# Altium PCB NS6202_V3.0.PcbDoc
Units mm, origin at the board's own origin, x right, y up, seen from the top; angles counter-clockwise.
Board outline 60.47 x 59.8 mm, 2 copper layers (Top, Bottom), stack 0.323 mm thick; 81 components, 109 nets, 381 pads, 283 vias.
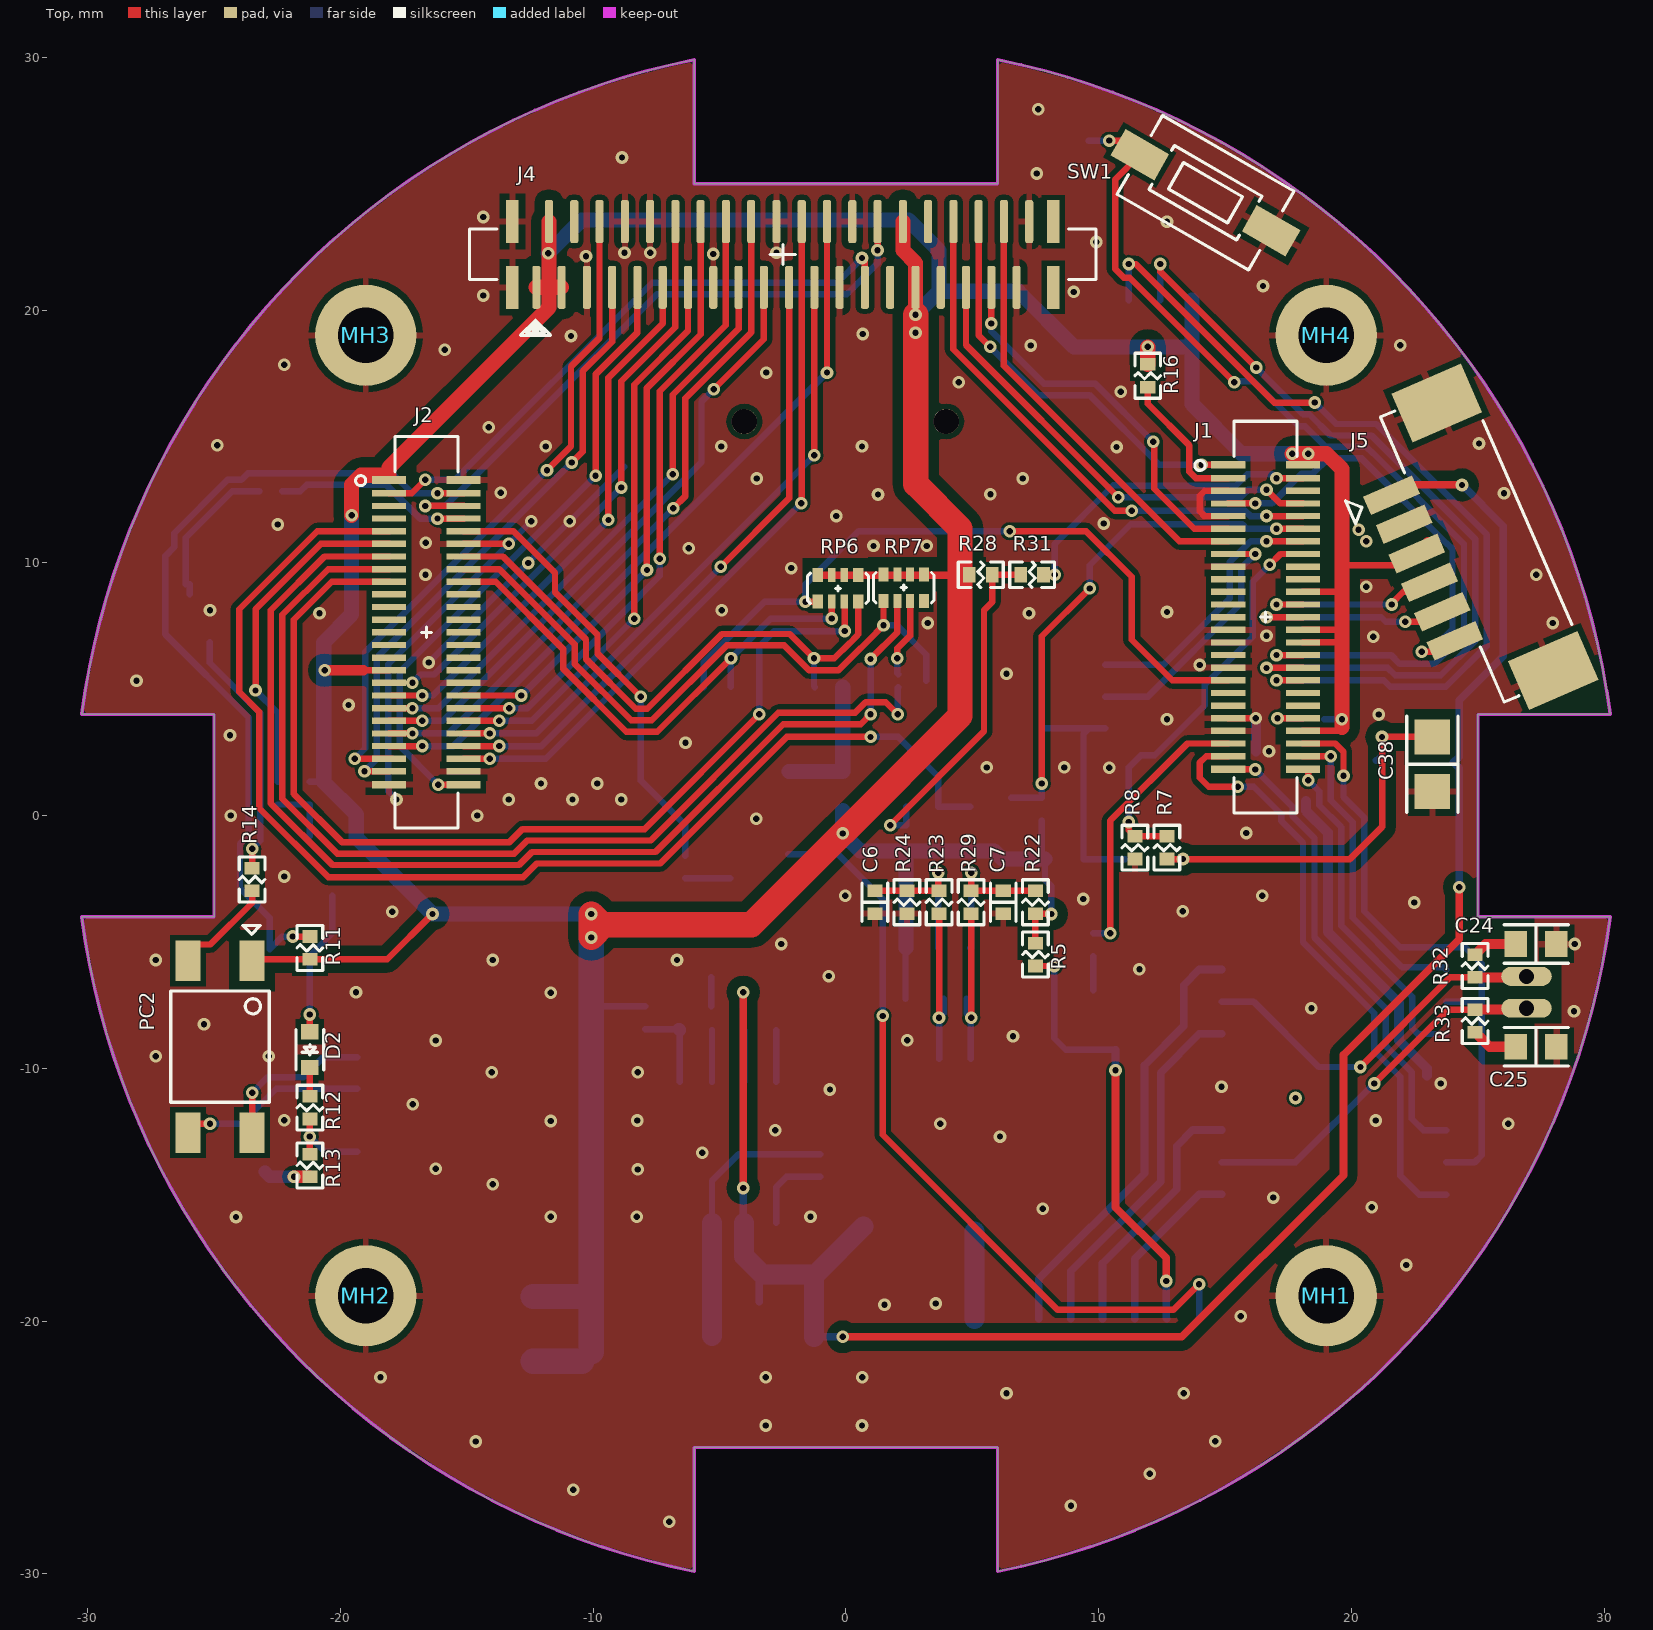
[diagram p0: Top view]
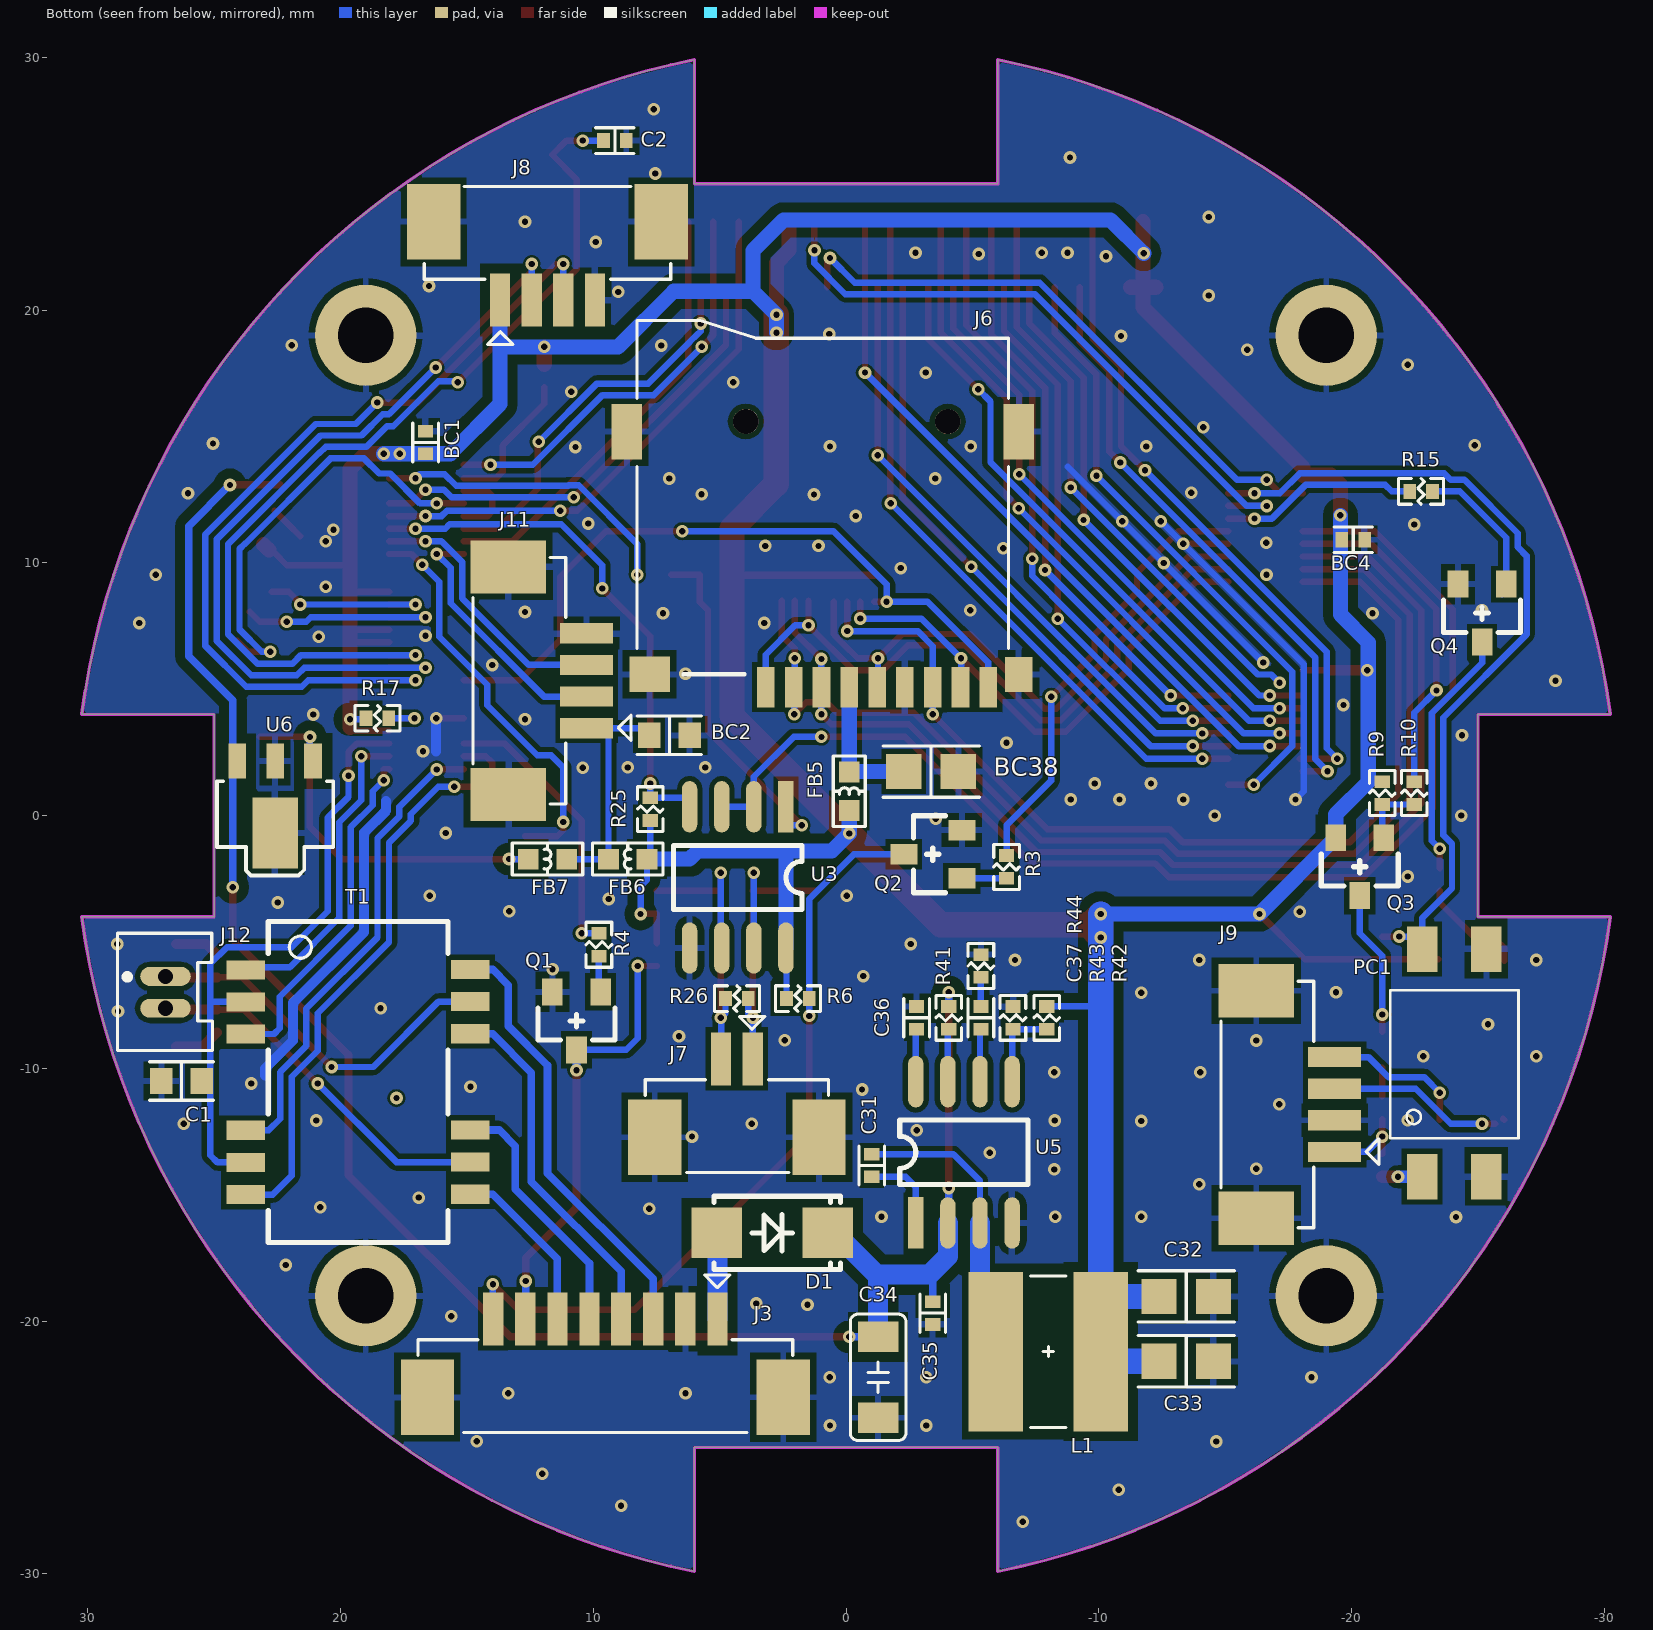
[diagram p1: Bottom view, seen from below]

## Layer stack, top to bottom
Solder Mask Top: solder mask 0.0102, Solder Resist, Dk 3.5
Top: signal copper 0.0343
Dielectric 1: core 0.254, FR-4, Dk 4.2
Bottom: signal copper 0.0343
Solder Mask Bottom: solder mask 0.0102, Solder Resist, Dk 3.5

## Board outline
-30.234,-4 -25,-4 -25,4 -30.234,4 -30.234,4.022 cw(c0,0) -6.018,29.9 -6,29.9 -6,25 6,25 6,29.9 6.011,29.902 cw(c0,0) 30.234,4.018 30.234,4 25,4 25,-4 30.228,-4 30.236,-4.001 cw(c0,0) 6.008,-29.902 6,-29.9 6,-25 -6,-25 -6,-29.9 -6.011,-29.902 cw(c0,0)

## Design rules (kind name [scope] priority, off if disabled: settings)
Clearance Clearance_4 [OnLayer('Keep-Out Layer') vs InNet('GND')] p1: gap=0.001
Clearance Clearance_3 [IsRegion vs (InNet('+12V') OR InNet('+12V_POE') OR InNet('+3.3V')OR InNet('+1.8V') or Innet('+5.0V')or Innet('N17346698'))] p2: gap=0.4
Clearance Clearance_2 [(InComponent('RP6') OR InComponent('RP7'))] p3: gap=0.16
Clearance Clearance_1 [IsVia] p4: gap=0.1
Clearance [All] p5: gap=0.2
ComponentClearance ComponentClearance_1 [(InComponent('J5') or InComponent('J6')) vs (InComponent('MH4') or InComponent('J8') or InComponent('J11'))] p1: gap=0 collisioncheckmode=3 verticalgap=0 showdistances=FALSE
ComponentClearance [All] p2: gap=0.01 collisioncheckmode=3 verticalgap=0.254 showdistances=FALSE
HoleSize [All] p1: absolutevalues=TRUE maxlimit=3.27 minlimit=0.025 maxpercent=80.000 minpercent=20.000
HoleToHoleClearance [All] p1: gap=0.01 allowstackedmicrovias=TRUE
MinimumSolderMaskSliver [All] p1: minsoldermaskwidth=0.01
PlaneConnect "Power Plane Connect Style - pads with no thermal_2" [(Name='U44-1') Or (Name='U45-1') Or (Name='U46-1') Or (Name='U47-1') Or (Name='U48-1') Or (Name='U49-1') Or (Name='U50-1') Or (Name='U51-1') Or (Name='U52-1') Or (Name='U55-1') Or (Name='U56-1') Or (Name='U57-1') Or (Name='U58-1') Or (Name='U6-1') Or (Name='U7-1') Or (Name='U8-1') Or (Name='U9-1')] p1: planeconnectstyle=NoConnect reliefexpansion=0.508 reliefentries=4 reliefconductorwidth=0.254 reliefairgap=0.254 // PAD - No Thermal Connect Rule
PlaneConnect "Power Plane Connect Style - pads with no thermal" [(Name='J10-0') Or (Name='J10-0/2') Or (Name='J11-0') Or (Name='J11-0/2') Or (Name='J13-6') Or (Name='J13-7') Or (Name='J2-13') Or (Name='J2-14') Or (Name='J4-15') Or (Name='J4-16') Or (Name='J6-5') Or (Name='J6-6') Or (Name='J6-9') Or (Name='J6-10') Or (Name='LS1-5') Or (Name='LS1-6') Or (Name='LS1-7') Or (Name='SW1-1') Or (Name='SW1-4') Or (Name='U10-1') Or (Name='U11-1') Or (Name='U12-1') Or (Name='U13-1') Or (Name='U14-1') Or (Name='U15-1') Or (Name='U16-1') Or (Name='U17-1') Or (Name='U18-1') Or (Name='U19-1') Or (Name='U20-1') Or (Name='U21-1') Or (Name='U22-1') Or (Name='U23-1') Or (Name='U24-1') Or (Name='U25-1') Or (Name='U26-1') Or (Name='U27-1') Or (Name='U28-1') Or (Name='U29-1') Or (Name='U30-1') Or (Name='U31-1') Or (Name='U32-1') Or (Name='U33-1') Or (Name='U34-1') Or (Name='U35-1') Or (Name='U36-1') Or (Name='U37-1') Or (Name='U38-1') Or (Name='U39-1') Or (Name='U40-1') Or (Name='U41-1') Or (Name='U42-1') Or (Name='U43-1')] p2: planeconnectstyle=NoConnect reliefexpansion=0.508 reliefentries=4 reliefconductorwidth=0.254 reliefairgap=0.254 // PAD - No Thermal Connect Rule
PlaneConnect [All] p3: planeconnectstyle=Relief reliefexpansion=0.508 reliefentries=4 reliefconductorwidth=0.254 reliefairgap=0.254
PolygonConnect PolygonConnect_1 [isVia] p1: connectstyle=Direct reliefconductorwidth=0.254 reliefentries=4 polygonreliefangle="90 Angle" airgapwidth=0.254
PolygonConnect [All] p2: connectstyle=Relief reliefconductorwidth=0.254 reliefentries=4 polygonreliefangle="90 Angle" airgapwidth=0.254
RoutingVias [All] p1: holewidth=0.25 width=0.5 viastyle="Through Hole" minholewidth=0.25 minwidth=0.5 maxholewidth=0.25 maxwidth=0.5
SilkToBoardRegionClearance [All] p1 off:
SilkToSilkClearance [All] p1: silktosilkclearance=0.01
SilkToSolderMaskClearance SilkToSolderMaskClearance_1 [OnLayer('Multi-Layer')] p1: minsilkscreentomaskgap=0 clearancetoexposedcopper=TRUE
SilkToSolderMaskClearance [IsPad] p2: minsilkscreentomaskgap=0.01 clearancetoexposedcopper=TRUE
SolderMaskExpansion [All] p1: expansion=0.102
Width Width_2 [InNet('VDD_3.3V')  or InNet('VDD_5.0V')] p1: maxlimit=3 minlimit=0.254 preferedwidth=2.4
Width Width_1 [InNet('+12V')] p2: maxlimit=1 minlimit=0.3 preferedwidth=0.5
Width [All] p3: maxlimit=1 minlimit=0.254 preferedwidth=0.254
21 further rules are at their usual default settings.

## Components (designator, comment, footprint, x,y, rotation, side; value= is the part's Value field where it differs from the comment)
BC1 "0.1uF" CS-1005 16.637,14.759 r270 bottom
BC2 "0.1uF" CS-1608 6.99,3.175 r0 bottom
BC4 "0.1uF" CS-1005 -20.066,10.911 r0 bottom
BC38 "22uF" CS-2012 -3.364,1.742 r0 bottom
C1 "0.1uF" CS-1608 26.289,-10.5 r0 bottom
C2 "1nF/NI" CS-1005 9.144,26.705 r180 bottom
C6 "2.2nF" CS-1005 1.143,-3.429 r90 top
C7 "2.2nF" CS-1005 6.223,-3.429 r90 top
C24 "0.1uF" CS-1608 27.305,-5.08 r0 top
C25 "0.1uF" CS-1608 27.305,-9.144 r0 top
C31 "10nF" CS-1005 -1.016,-13.843 r90 bottom
C32 "22uF-2012-6.3V" CS-2012 -13.462,-19.024 r180 bottom
C33 "22uF-2012-6.3V" CS-2012 -13.462,-21.59 r180 bottom
C34 "4.7uF-25V" C3216 -1.27,-22.225 r270 bottom
C35 "0.1uF" CS-1005 -3.429,-19.685 r270 bottom
C36 "0.1uF" CS-1005 -2.794,-8.001 r90 bottom
C37 "3.3nF" CS-1005 -5.334,-8.001 r90 bottom
C38 "22uF-2012-6.3V" CS-2012 23.201,2.032 r270 top
D1 "RB051L-40" SOD-106 2.921,-16.51 r180 bottom
D2 "1N4148" SOD-523 -21.209,-9.262 r90 top
FB5 "60" LS-1608 -0.127,0.962 r90 bottom
FB6 "60/NI" LS-1608 8.636,-1.72 r0 bottom
FB7 "60" LS-1608 11.811,-1.72 r180 bottom
J1 "AXK6F30547" AXK6F50547 16.6,7.85 r270 top locked
J2 "AXK6F50347" AXK6F50547 -16.6,7.25 r270 top locked
J3 "12505WS-08" 12505WS-8P 9.525,-21.463 r180 bottom
J4 "05005HS-40" 05005HS-40P -2.5,22.2 r0 top locked
J5 "12505WS-06" 12505WS-6P 24.257,10.414 r293.5 top
J6 "CON_u-SD/NI" CON_u-SD 3.175,5.08 r180 bottom
J7 "12505WS-2P" 12505WS-2P 4.318,-11.176 r0 bottom
J8 "12505WS-4P//NI" 12505WS-4P 11.811,21.942 r0 bottom
J9 "12505WS-4P//NI" 12505WS-4P -17.78,-11.43 r270 bottom
J11 "12505WS-4P//NI" 12505WS-4P 11.811,5.334 r270 bottom
J12 "12512WS-02//NI" 12512WS-2P 26.924,-6.992 r270 bottom
L1 "CDRH5D18NP-100NC-10uH" CDRH5D18NP -8.001,-21.209 r270 bottom
MH1 "4.04pi" VA-2.2 19,-19 r0 top locked
MH2 "4.04pi" VA-2.2 -19,-19 r0 top locked
MH3 "4.04pi" VA-2.2 -19,19 r0 top locked
MH4 "4.04pi" VA-2.2 19,19 r0 top locked
PC1 "PC817" PC817 -24.003,-9.779 r90 bottom
PC2 "ASSR-4118" ASSR-4118 -24.765,-9.144 r180 top
Q1 "MMBT6427" SOT-23 10.668,-8.128 r270 bottom
Q2 "MMBT6427" SOT-23 -3.425,-1.524 r0 bottom
Q3 "MMBT3906" SOT-23 -20.32,-2.032 r270 bottom
Q4 "MMBT6427" SOT-23 -25.159,8.001 r270 bottom
R3 "10K" RS-1005#1 -6.35,-2.032 r90 bottom
R4 "10K" RS-1005#1 9.779,-5.111 r90 bottom
R5 "1K" RS-1005#1 7.493,-5.5 r270 top
R6 "1K" RS-1005#1 1.905,-7.239 r180 bottom
R7 "1K" RS-1005#1 12.7,-1.27 r270 top
R8 "0/NI" RS-1005#1 11.43,-1.27 r270 top
R9 "10K" RS-1005#1 -21.214,0.889 r270 bottom
R10 "1K" RS-1005#1 -22.479,0.889 r270 bottom
R11 "10K" RS-1005#1 -21.209,-5.236 r270 top
R12 "330" RS-1005#1 -21.209,-11.557 r90 top
R13 "2.2K" RS-1005#1 -21.209,-13.843 r270 top
R14 "330" RS-1005#1 -23.495,-2.529 r90 top
R15 "1K" RS-1005#1 -22.751,12.827 r180 bottom
R16 "10K" RS-1005#1 11.938,17.399 r90 top
R17 "10K" RS-1005#1 18.542,3.85 r0 bottom
R22 "10K" RS-1005#1 7.493,-3.429 r270 top
R23 "47" RS-1005#1 3.683,-3.429 r270 top
R24 "10K" RS-1005#1 2.413,-3.429 r90 top
R25 "10K" RS-1005#1 7.747,0.254 r270 bottom
R26 "120/NI" RS-1005#1 4.318,-7.239 r180 bottom
R28 "10K" RS-1005#2 5.334,9.525 r0 top
R29 "47" RS-1005#1 4.953,-3.429 r270 top
R31 "100" RS-1005#1 7.366,9.527 r180 top
R32 "75" RS-1005#1 24.892,-5.95 r270 top
R33 "75" RS-1005#1 24.892,-8.128 r90 top
R41 "100K" RS-1005#1 -4.064,-8.001 r270 bottom
R42 "26.1K_1%" RS-1005#1 -7.939,-8.001 r270 bottom
R43 "10K_1%" RS-1005#1 -6.604,-8.001 r270 bottom
R44 "2.2K" RS-1005#1 -5.334,-5.95 r270 bottom
RP6 "10K" RP-4_1005 -0.313,8.987 r180 top
RP7 "10K" RP-4_1005 2.286,9.017 r180 top
SW1 "SW PB" SWS-CTT-1131U 14.224,24.638 r150 top
T1 "TRC41604NL" TRC41604NL 19.304,-10.541 r270 bottom
U3 "MAX3485ESA" SOIC-8 4.318,-2.432 r0 bottom
U5 "MP1482" SOIC-8 -4.699,-13.335 r180 bottom
U6 "78L05" SOT-89 22.586,2.158 r0 bottom

## Footprints (in the part's own frame and the unit in brackets; to place one, negate y for a bottom-side part, rotate by r counter-clockwise, add the part's x,y. Pads: shape width x height; smd on the part's side, far side on the other; paste and mask are expansions set on the pad)
05005HS-40P [mm]
  rrect50% 0.32x1.7 smd: 1(-9.75,-1.3) 2(-9.25,1.3) 3(-8.75,-1.3) 4(-8.25,1.3) 5(-7.75,-1.3) 6(-7.25,1.3) 7(-6.75,-1.3) 8(-6.25,1.3) 9(-5.75,-1.3) 10(-5.25,1.3) 11(-4.75,-1.3) 12(-4.25,1.3) 13(-3.75,-1.3) 14(-3.25,1.3) 15(-2.75,-1.3) 16(-2.25,1.3) 17(-1.75,-1.3) 18(-1.25,1.3) 19(-0.75,-1.3) 20(-0.25,1.3) 21(0.25,-1.3) 22(0.75,1.3) 23(1.25,-1.3) 24(1.75,1.3) 25(2.25,-1.3) 26(2.75,1.3) 27(3.25,-1.3) 28(3.75,1.3) 29(4.25,-1.3) 30(4.75,1.3) 31(5.25,-1.3) 32(5.75,1.3) 33(6.25,-1.3) 34(6.75,1.3) 35(7.25,-1.3) 36(7.75,1.3) 37(8.25,-1.3) 38(8.75,1.3) 39(9.25,-1.3) 40(9.75,1.3)
  rect 0.5x1.7 smd: M1(-10.7,1.3) M2(-10.7,-1.3) M3(10.7,1.3) M4(10.7,-1.3)
  silkscreen extent -12.4,-3.2 12.4,1
12505WS-2P [mm]
  rect 0.8x2.1 smd: 1(-0.625,-1.55) 2(0.625,-1.55)
  rect 2.1x3 smd: 3(3.25,1.55) 4(-3.25,1.55)
  silkscreen extent -3.62,-3.22 3.63,2.95
12505WS-4P [mm]
  rect 0.8x2.1 smd: 1(1.875,1.55) 2(0.625,1.55) 3(-0.625,1.55) 4(-1.875,1.55)
  rect 2.1x3 smd: 5(-4.5,-1.55) 6(4.5,-1.55)
  silkscreen extent -4.88,-2.95 4.88,3.3
12505WS-6P [mm]
  rect 0.8x2.1 smd: 1(-3.145,-1.55) 2(-1.895,-1.55) 3(-0.625,-1.55) 4(0.625,-1.55) 5(1.895,-1.55) 6(3.145,-1.55)
  rect 2.1x3 smd: M1(-5.77,1.55) M2(5.77,1.55)
  silkscreen extent -6.14,-3.31 6.15,2.95
12505WS-8P [mm]
  rect 0.8x2.1 smd: 1(4.435,1.55) 2(3.165,1.55) 3(1.895,1.55) 4(0.625,1.55) 5(-0.625,1.55) 6(-1.895,1.55) 7(-3.165,1.55) 8(-4.435,1.55)
  rect 2.1x3 smd: 9(7.04,-1.55) 10(-7.04,-1.55)
  silkscreen extent -7.41,-2.95 7.41,3.29
12512WS-2P [mm]
  oval 0.75x2 hole 0.6: 1(-0.63,0) 2(0.63,0)
  silkscreen extent -2.34,-1.9 2.3,1.87
ASSR-4118 [mm]
  rect 1x1.6 smd: 1(-1.27,-3.4) 2(1.27,-3.4) 3(1.27,3.4) 4(-1.27,3.4)
  silkscreen extent -1.95,-4.8 1.95,2.2
AXK6F50547 [mm]
  rect 0.3x1.35 smd: 1(-6.025,-1.475) 2(-6.025,1.475) 49(6.025,-1.475) 50(6.025,1.475)
  rect 0.25x1.35 smd: 3(-5.5,-1.475) 4(-5.5,1.475) 5(-5,-1.475) 6(-5,1.475) 7(-4.5,-1.475) 8(-4.5,1.475) 9(-4,-1.475) 10(-4,1.475) 11(-3.5,-1.475) 12(-3.5,1.475) 13(-3,-1.475) 14(-3,1.475) 15(-2.5,-1.475) 16(-2.5,1.475) 17(-2,-1.475) 18(-2,1.475) 19(-1.5,-1.475) 20(-1.5,1.475) 21(-1,-1.475) 22(-1,1.475) 23(-0.5,-1.475) 24(-0.5,1.475) 25(0,-1.475) 26(0,1.475) 27(0.5,-1.475) 28(0.5,1.475) 29(1,-1.475) 30(1,1.475) 31(1.5,-1.475) 32(1.5,1.475) 33(2,-1.475) 34(2,1.475) 35(2.5,-1.475) 36(2.5,1.475) 37(3,-1.475) 38(3,1.475) 39(3.5,-1.475) 40(3.5,1.475) 41(4,-1.475) 42(4,1.475) 43(4.5,-1.475) 44(4.5,1.475) 45(5,-1.475) 46(5,1.475) 47(5.5,-1.475) 48(5.5,1.475)
  silkscreen extent -7.75,-2.8 7.75,1.25
C3216 [mm]
  rect 1.2x1.6 smd: 1(-1.6,0) 2(1.6,0)
  silkscreen extent -2.5,-1.1 2.5,1.1
CDRH5D18NP [mm]
  rect 6.3x2.15 smd: 1(0,-2.075) 2(0,2.075)
  silkscreen extent -3,-0.7 3,0.7
CON_u-SD [mm]
  rect 0.7x1.6 smd: 1(0,0) 2(1.105,0) 3(2.201,0) 4(3.303,0) 5(4.407,0) 6(5.504,0) 7(6.6,0) 8(7.705,0) CD(8.801,0)
  rect 1.1x1.4 smd: 9(10.006,0.499)
  rect 1.6x1.4 smd: 10(-4.596,0.508)
  rect 1.2x2.2 smd: 11(10.012,10.108) 12(-5.497,10.108)
  round 1 hole 1: 13(7.198,10.509) 14(-0.79,10.513)
  silkscreen extent -5.1,0.48 9.6,14.51
CS-1005 [mm]
  rect 0.5x0.6 smd: 1(-0.45,0) 2(0.45,0)
  silkscreen extent -0.76,-0.51 0.76,0.51
CS-1608 [mil]
  rect 35x40 smd: 1(-31.5,0) 2(31.5,0)
  silkscreen extent -50,-30 50,30
CS-2012 [mil]
  rect 55x55 smd: 1(-42.5,0) 2(42.5,0)
  silkscreen extent -75,-40 75,40
LS-1608 [mil]
  rect 32x32 smd: 1(-30,0) 2(30,0)
  silkscreen extent -55,-25 55,25
PC817 [mm]
  rect 1.8x1.2 smd: 1(-4.506,1.208) 2(-4.506,-1.332) 3(4.494,-1.332) 4(4.494,1.208)
  silkscreen extent -2.98,-2.6 2.86,2.48
RP-4_1005 [mm]
  rect 0.406x0.55 smd: 1(-0.8,0.525) 2(-0.8,-0.525) 7(0.8,0.525) 8(0.8,-0.525)
  rect 0.305x0.55 smd: 3(-0.25,0.525) 4(-0.25,-0.525) 5(0.25,0.525) 6(0.25,-0.525)
  silkscreen extent -1.2,-0.6 1.2,0.6
RS-1005#1 [mm]
  rect 0.5x0.6 smd: 1(-0.45,0) 2(0.45,0)
  silkscreen extent -0.89,-0.51 0.89,0.51
RS-1005#2 [mm]
  rect 0.5x0.6 smd: 1(0.45,0) 2(-0.45,0)
  silkscreen extent -0.89,-0.51 0.89,0.51
SOD-106 [mm]
  rrect0% 2x2 smd: 1(-2.2,0) 2(2.2,0)
  silkscreen extent -2.3,-1.45 2.7,1.45
SOD-523 [mm]
  rect 0.6x0.7 smd: 1(0.71,0) 2(-0.71,0)
  silkscreen extent -0.8,-0.55 0.8,0.55
SOIC-8 [mil]
  rect 24x80 smd: 1(-76.34,-109.45)
  oval 24x80 smd: 2(-26.34,-109.45) 3(23.66,-109.45) 4(73.66,-109.45) 5(73.66,110.55) 6(23.66,110.55) 7(-26.34,110.55) 8(-76.34,110.55)
  silkscreen extent -101,-49 99,51
SOT-23 [mil]
  rect 42x32 smd: 1(-45.45,37.75) 2(-45.45,-37.35) 3(44.85,0.2)
  silkscreen extent -20,-60 30,60
SOT-89 [mm]
  rect 0.7x1.4 smd: 1(-1.5,0) 2(0,0) 3(1.5,0)
  rect 1.8x2.8 smd: 4(0,2.85)
  silkscreen extent -2.3,0.8 2.3,4.52
SWS-CTT-1131U [mm]
  rect 2x1.2 smd: 1(-3,0) 2(3,0)
  silkscreen extent -3,-1.8 3,1.8
TRC41604NL [mm]
  rect 0.76x1.52 smd: 1(-4.436,-4.445) 2(-3.168,-4.445) 3(-1.898,-4.445) 6(1.912,-4.445) 7(3.182,-4.445) 8(4.452,-4.445) 9(4.438,4.445) 10(3.168,4.445) 11(1.898,4.445) 14(-1.912,4.445) 15(-3.182,4.445) 16(-4.452,4.445)
  silkscreen extent -6.35,-3.56 6.35,3.56
VA-2.2 [mm]
  rrect100% 4x4 hole 2.2: 1(0,0)

## Via types
v1: diameter 0.5, hole 0.25, Top to Bottom, tented both sides, 283 vias

## Nets (pads, with @x,y where several pads share a name; then routed paths per layer and width w, separated by ;. In a path a pad name is that pad's centre, name@x,y a point inside that pad or via, vN(x,y) a via of type N, cw(c..) or ccw(c..) an arc to the next point about the centre after c; other vN are vias at no path point)
+3.3V: BC1.2 BC4.2 C32.1 C33.1 FB5.1 FB6.1 J1.2 J1.22 J1.28 J1.30 J1.44 J2.1 J2.31 J4.1 J4.2 J4.3 J4.30 J4.31 J5.3 J8.1 L1.2 PC2.1 Q3.2 R5.1 R6.1 R9.1 R11.2 R16.2 R17.2 R22.2 R25.2 R28.2 R42.1 RP6.2 RP6.4 RP6.6 RP6.8 RP7.2 RP7.4 RP7.6 RP7.8 U3.8 | length 205.4
  Top w0.254: PC2.1@-23.437,-5.686 R11.2 -18.151,-5.686 v1(-16.357,-3.892) ; -19.082,5.75 J2.31 ; R5.1 R22.2 v1@8.115,-3.879 ; J1.44 19.479,3.35 19.621,3.492 ; J1.30 19.57,6.85 ; J1.28 19.57,7.35 ; J1.22 19.57,8.85 ; 19.637,9.906 22.123,9.906 J5.3
  Top w0.3: RP6.8 RP6.6 RP6.4 RP6.2 4.502,9.512
  Top w0.4: v1(-20.623,5.75) -19.082,5.75
  Top w0.6: v1(-19.558,11.877) -19.558,13.091 -19.187,13.462 -18.075,13.462 ; -18.075,13.776 -11.75,20.101 -11.75,20.9 ; J4.1 -11.75,20.9 ; J4.2 -11.75,20.9 ; J4.3 -11.75,20.9 ; J4.30 2.25,22.367 2.75,21.867 J4.31 v1(2.75,19.812) ; R16.2 v1(11.938,18.542) ; v1(17.653,14.313) v1(18.288,14.313) 19.017,14.313 19.621,13.708 v1(19.621,3.81) 19.621,3.492 ; J5.3@22.832,10.508 J5.3@23.04,10.716
  Top w1: -9.568,-4.318 v1(-10.076,-4.826) v1(-10.076,-3.892) -9.65,-4.318 -3.741,-4.318 v1(-0.127,-0.706) v1(-0.127,-0.706) 4.515,3.936 4.515,11.36 2.765,13.11 v1@2.765,19.812
  Bottom w0.254: R9.1 -20.781,1.339 ; -10.007,-7.551 R42.1 ; R6.1 U3.8@2.355,-5.264 ; FB6.1@7.747,-1.593 R25.2 ; FB6.1 7.874,-2.54 8.128,-2.794 v1(8.128,-3.892) ; R17.2@18.923,3.81 v1@19.616,3.81
  Bottom w0.6: v1(-19.558,11.877) -19.558,7.952 -20.658,6.852 -20.658,1.335 -19.371,0.048 Q3.2 v1(-16.357,-3.892) v1(-10.076,-3.892) ; v1(-11.778,22.245) -10.465,23.558 2.477,23.558 3.683,22.352 3.683,20.745 ; FB5.1 v1(-0.127,-0.706) 0.564,-1.397 5.866,-1.397 6.189,-1.72 FB6.1 ; U3.8 2.379,-1.431 ; v1(2.75,19.106) v1(2.75,19.812) 3.683,20.745 ; J8.1 13.686,18.597 ; v1(18.288,14.313) 15.659,14.313 13.686,16.286 13.686,18.597 ; 3.683,20.745 6.814,20.745 9.017,18.542 v1(11.938,18.542) 13.631,18.542 13.686,18.597
  Bottom w1: C33.1 L1.2@-10.457,-21.59 ; C32.1 L1.2@-10.102,-19.024 ; L1.2 v1(-10.076,-3.892)
+5.0V: C38.1 FB7.1 R7.2 U6.1 | length 16.4
  Top w0.254: R7.2 v1(13.335,-1.72) 19.939,-1.72 21.209,-0.45 v1(21.209,3.111) C38.1
  Bottom w0.254: FB7.1 v1(13.335,-1.72) ; U6.1@20.953,2.185 20.979,2.159 21.209,2.389 v1(21.209,3.111)
+12V: C34.1 C35.1 D1.2 J5.1 R41.1 U5.2 U6.3 | length 76.6
  Top w0.3: v1(-4.064,-14.732) v1(-4.064,-6.985) ; v1(-0.127,-20.625) 13.286,-20.625 19.685,-14.226 19.685,-9.467 24.257,-4.895 v1(24.257,-2.835) ; J5.1@22.409,13.081 v1(24.372,13.081)
  Bottom w0.3: U5.2@-4.064,-16.081 v1(-4.064,-14.732) ; R41.1 v1(-4.064,-6.985) ; C35.1 -3.429,-18.034 ; C34.1 v1(-0.127,-20.625) ; U6.3@24.033,2.105 24.257,1.881 v1(24.257,-2.835) ; U6.3 24.257,2.329 24.257,4.556 26.003,6.302 26.003,11.45 v1(24.372,13.081)
  Bottom w0.8: U5.2 -4.03,-17.433 -3.429,-18.034 -3.302,-18.161 -1.27,-18.161 ; C34.1 -1.27,-18.22 ; -1.211,-18.161 D1.2@0.694,-16.256
AIN: J1.39
AOUT: J1.31
DAC_OUT: J1.37
DI_CON0: J9.1 R12.1 R13.1 | length 3.5
  Top w0.254: R13.1@-21.214,-13.388 v1(-21.214,-12.7) R12.1@-21.214,-12.012
  Bottom w0.254: v1(-21.214,-12.7) -20.609,-13.305 J9.1
DI_D0: J2.4 PC1.4 R11.1 | length 33.1
  Top w0.254: v1(-21.884,-4.786) R11.1 ; v1(-16.158,12.75) J2.4
  Bottom w0.254: v1(-21.884,-4.786) -22.296,-4.786 PC1.4 -22.795,-4.053 -23.972,-2.876 -23.972,-1.12 -23.622,-0.77 -23.622,3.865 -26.924,7.167 -26.924,10.273 -26.572,10.625 -26.572,11.175 -24.466,13.281 -23.916,13.281 -23.662,13.535 -17.944,13.535 -17.159,12.75 v1(-16.158,12.75)
DI_TYPE: J2.11 R10.1 | length 13.5
  Top w0.254: v1(-23.358,4.951) -23.358,8.164 -20.772,10.75 J2.11
  Bottom w0.254: v1(-23.358,4.951) -22.479,4.072 R10.1
DO_COM_CON: J9.4 PC2.4 | length 5.8
  Top w0.254: PC2.4@-23.495,-12.036 v1(-23.495,-10.961)
  Bottom w0.254: v1(-23.495,-10.961) -22.885,-10.351 -21.465,-10.351 -20.669,-9.555 J9.4
DO_CON0: J9.3 PC2.3 | length 7
  Top w0.254: PC2.3@-26.035,-12.036 PC2.3@-25.992,-11.993 ; PC2.3@-25.683,-12.192 v1(-25.159,-12.192)
  Bottom w0.254: v1(-25.159,-12.192) -23.927,-12.192 -22.54,-10.805 J9.3
DO_D0: J2.8 R15.1 | length 7.8
  Top w0.254: v1(-16.158,11.75) J2.8
  Bottom w0.254: R15.1 -21.586,12.827 -21.332,13.081 -18.18,13.081 -16.849,11.75 v1(-16.158,11.75)
EPHY_TRCT: C1.1 J1.46 T1.2 T1.7 | length 24.4
  Top w0.254: J1.46 19.362,2.85 19.685,2.527 v1(19.685,1.576)
  Bottom w0.254: v1(19.685,1.576) 19.685,0.735 20.499,-0.078 20.499,-3.782 21.924,-5.207 24.492,-5.207 25.153,-5.868 25.153,-7.373 ; T1.7 24.866,-13.723 25.153,-13.436 25.153,-7.373 ; T1.2 25.153,-7.373
FD_SW: C2.1 J1.32 SW1.2 | length 38.2
  Top w0.254: v1(10.414,26.705) 11.059,26.705 SW1.2 10.646,25.158 10.646,21.635 10.998,21.284 11.228,21.284 v1(15.367,17.145) ; v1(17.033,6.35) J1.32
  Bottom w0.254: C2.1 v1(10.414,26.705) ; v1(15.367,17.145) 15.401,17.179 16.138,17.179 17.911,15.406 18.159,15.406 18.981,14.584 20.586,14.584 20.819,14.351 20.835,14.351 24.45,10.736 24.45,7.171 23.279,6 21.914,6 21.564,6.35 v1(17.033,6.35)
FOCUS_CTRL_CLK: J2.23
FOCUS_CTRL_DIR: J2.26
FOCUS_CTRL_EN: J2.29
FOCUS_CTRL_NFAULT: J2.21
FOCUS_CTRL_NSLEEP: J2.24
GND: BC1.1 BC2.1 BC4.1 BC38.1 C1.2 C2.2 C6.1 C7.1 C24.2 C25.2 C32.2 C33.2 C34.2 C35.2 C36.2 C38.2 J1.5 J1.9 J1.17 J1.27 J1.29 J1.33 J1.41 J1.43 J2.2 J2.12 J2.34 J2.48 J2.49 J3.2 J3.9 J3.10 J4.5 J4.8 J4.10 J4.15 J4.20 J4.25 J4.26 J4.33 J4.39 J4.40 J4.M1 J4.M2 J5.2 J5.M1 J5.M2 J6.6 J6.9 J6.10 J6.11 J6.12 J7.3 J7.4 J8.4 J8.5 J8.6 J9.2 J9.5 J9.6 J11.4 J11.5 J11.6 MH1.1 MH2.1 MH3.1 MH4.1 PC1.2 PC1.3 Q1.2 Q2.2 Q4.2 R8.2 R24.1 R43.1 R44.1 SW1.1 U3.5 U5.4 U6.2 U6.4 | length 45.8
  Top w0.254: J2.12 v1@-13.409,10.75 ; J1.41 v1(16.216,3.85) ; J1.9 14.185,11.85 13.999,12.036 13.999,12.649 14.2,12.85 J1.5 ; J5.2@21.595,11.049 J5.2 J5.2@22.611,12.065
  Bottom w0.254: v1(-17.78,0.635) -18.107,0.962 -18.107,5.986 v1(-13.335,10.758) v1(-12.446,11.647) ; v1(-16.508,6.058) -8.768,13.798
  Bottom w0.4: 16.216,2.545 v1(16.216,3.85) ; 18.196,0.565 18.196,0.195 19.064,-0.673 19.064,-4.602 21.878,-7.417 21.878,-8.895 22.987,-10.004 22.987,-10.287
  other v1: -6.985,-27.94 8.9,-27.305 -10.795,-26.67 12.02,-26.035 -14.644,-24.765 14.605,-24.759 -3.175,-24.13 0.635,-24.13 6.35,-22.86 13.36,-22.86 -18.415,-22.225 -3.175,-22.225 0.64,-22.225 15.621,-19.812 1.524,-19.355 3.556,-19.304 22.169,-17.78 -24.13,-15.881 -11.684,-15.875 -8.277,-15.875 -1.401,-15.875 7.785,-15.559 20.807,-15.494 16.905,-15.113 -13.97,-14.58 -8.24,-13.999 -16.233,-13.97 -5.686,-13.335 6.096,-12.7 -2.794,-12.448 3.725,-12.192 26.201,-12.192 -11.684,-12.082 -22.225,-12.055 -8.255,-12.065 20.955,-12.065 -17.145,-11.415 -0.635,-10.835 14.859,-10.726 23.531,-10.599 -14.013,-10.16 -8.24,-10.16 -27.305,-9.525 -22.835,-9.525 -16.233,-8.901 2.42,-8.89 6.611,-8.731 -25.4,-8.255 28.804,-7.747 18.415,-7.622 -11.684,-7.014 -19.383,-6.985 -0.682,-6.35 11.61,-6.076 -27.305,-5.715 -13.97,-5.715 -6.683,-5.715 -2.565,-5.08 28.829,-5.08 -17.95,-3.81 13.321,-3.782 22.479,-3.438 9.385,-3.301 -0.029,-3.175 16.469,-3.175 -22.225,-2.413 15.834,-0.691 -3.554,-0.127 -24.336,0 -14.583,0 -13.335,0.635 -10.818,0.635 -8.89,0.635 -12.065,1.27 -9.841,1.27 10.414,1.894 5.574,1.905 8.636,1.905 16.734,2.545 -6.35,2.876 -24.37,3.175 12.702,3.81 21.082,4 -19.678,4.372 -28.067,5.334 6.35,5.606 13.999,5.959 20.865,7.079 16.637,7.112 3.24,7.618 27.966,7.618 -20.826,8.001 7.239,8.001 12.7,8.054 -25.159,8.128 -4.914,8.128 20.589,9.057 -16.637,9.527 27.305,9.525 -2.159,9.792 -12.573,9.993 -6.223,10.578 1.092,10.668 3.19,10.668 -16.625,10.795 20.589,10.85 20.28,11.303 -22.479,11.514 10.201,11.557 -10.922,11.644 -0.381,11.85 1.265,12.7 5.715,12.716 26.035,12.756 -13.66,12.776 -3.524,13.335 6.995,13.335 10.706,14.584 -11.873,14.605 -4.936,14.605 0.633,14.605 -24.872,14.647 25.043,14.722 -14.128,15.367 10.877,16.764 4.465,17.145 -3.156,17.526 -22.225,17.834 -15.875,18.426 7.313,18.597 21.924,18.607 -10.877,18.972 0.67,19.05 -14.351,20.574 9.017,20.717 16.501,20.953 -10.287,22.122 -5.25,22.22 -8.763,22.261 -7.747,22.261 -2.751,22.261 9.906,22.693 12.7,23.495 -14.351,23.683 7.55,25.4 -8.86,26.035 7.607,27.94
I2C_SCL: J1.24 J5.4 | length 7
  Top w0.254: v1(17.033,8.35) J1.24 ; v1(21.59,8.35) 21.59,8.389 22.051,8.85 J5.4@22.712,8.85
  Bottom w0.254: v1(17.033,8.35) v1(21.59,8.35)
I2C_SDA: J1.26 J5.5 | length 8.6
  Top w0.254: v1(16.637,7.85) J1.26 ; v1(22.123,7.668) 23.201,7.668 J5.5
  Bottom w0.254: v1(16.637,7.85) 21.174,7.85 21.356,7.668 v1(22.123,7.668)
IR_PWM: J1.7 J5.6 | length 17.4
  Top w0.254: J1.7 v1(16.191,12.35) ; v1(22.781,6.477) 23.655,6.477 J5.6
  Bottom w0.254: v1(16.191,12.35) 16.852,12.35 18.035,13.533 18.473,13.533 19.07,14.13 20.398,14.13 23.769,10.759 23.785,10.759 23.996,10.548 23.996,7.359 23.114,6.477 v1(22.781,6.477)
LED0: J3.7 Q1.3 R5.2 | length 17.7
  Top w0.254: R5.2 v1(8.236,-5.95)
  Top w0.3: v1(10.663,-10.072) 10.663,-15.489 12.668,-17.494 v1(12.668,-18.415)
  Bottom w0.254: v1(8.236,-5.95) 8.236,-8.807 8.697,-9.267 Q1.3
  Bottom w0.3: v1(10.663,-10.072) Q1.3 ; v1(12.668,-18.415) 12.668,-19.891 J3.7
LED1: J3.8 Q2.3 R6.2 | length 31
  Top w0.254: v1(1.455,-7.926) 1.455,-12.631 8.382,-19.558 12.954,-19.558 v1(13.97,-18.542)
  Bottom w0.254: Q2.3 -2.283,-1.533 -0.313,-1.533 1.455,-3.301 R6.2 v1(1.455,-7.926) ; J3.8 13.97,-19.903 v1(13.97,-18.542)
LED_GN: J2.10 R3.2 | length 17.6
  Top w0.254: J2.10 -13.153,11.25 -11.511,9.608 -11.511,8.834 -9.83,7.153 -9.83,6.413 v1(-8.116,4.699)
  Bottom w0.254: v1(-8.116,4.699) -8.116,1.385 -6.35,-0.381 R3.2
LED_MLINK: J1.45 R4.2 | length 11.1
  Top w0.254: v1(10.461,-4.661) 10.461,-0.198 13.509,2.85 J1.45
  Bottom w0.254: R4.2 v1(10.461,-4.661)
LENC_IRIS_PWM1: J2.30
LENC_IRIS_PWM2: J2.27
N15229178: Q3.1 R9.2 R10.2 | length 2.6
  Bottom w0.254: R10.2 R9.2 -21.214,-0.813 Q3.1
N15229370: D2.1 Q3.3 | length 5.8
  Top w0.254: v1(-21.214,-7.869) -21.209,-7.874 D2.1
  Bottom w0.254: v1(-21.214,-7.869) -21.214,-5.542 -20.325,-4.653 Q3.3
N15229490: PC1.1 R13.2 | length 1.9
  Top w0.5: v1(-21.836,-14.293) R13.2
  Bottom w0.5: PC1.1@-22.983,-14.097 PC1.1 -21.844,-14.285 v1(-21.836,-14.293)
N16657531: D2.2 R12.2 | length 1.1
  Top w0.254: R12.2 D2.2
N16698572: Q4.3 R14.2 | length 9.9
  Top w0.254: R14.2 v1(-23.495,-1.318)
  Bottom w0.254: Q4.3 -25.164,6.049 -23.168,4.053 -23.168,-0.991 v1(-23.495,-1.318)
N17016752: R41.2 U5.7 | length 2
  Bottom w0.254: U5.7 R41.2@-4.03,-8.485
N17016775: C36.1 U5.8 | length 2
  Bottom w0.254: U5.8 C36.1@-2.76,-8.485
N17016804: C37.1 U5.6 | length 2
  Bottom w0.254: U5.6 C37.1@-5.3,-8.485
N17016806: C37.2 R44.2 | length 1.2
  Bottom w0.254: C37.2 R44.2
N17016820: R42.2 R43.2 U5.5 | length 3.4
  Bottom w0.254: R42.2 R43.2 ; U5.5 R43.2@-6.57,-8.485
  Bottom w0.5: R43.2 R43.2@-6.57,-8.485
N17016832: C31.2 L1.1 U5.3 | length 10.9
  Bottom w0.254: U5.3 -5.3,-14.444 -4.249,-13.393 C31.2
  Bottom w0.8: L1.1@-5.3,-20.583 U5.3
N17334107: C6.2 R23.1 R24.2 U3.7 | length 6.2
  Top w0.254: C6.2 R23.1 ; R23.1@3.649,-2.945 v1(3.649,-2.26)
  Bottom w0.254: U3.7 v1(3.649,-2.26)
N17334109: R28.1 R31.2 U3.1 | length 14.1
  Top w0.254: v1(1.75,-0.381) 5.461,3.33 5.461,8.128 5.784,8.451 R28.1 5.786,9.527 R31.2
  Bottom w0.254: v1(1.75,-0.381) 2.379,-0.381 U3.1
N17334111: C7.2 R22.1 R29.1 U3.6 | length 6.3
  Top w0.254: v1(4.953,-2.26) R29.1 R22.1
  Bottom w0.254: U3.6 4.953,-5.206 v1(4.953,-2.26)
N17340800: PC2.2 R14.1 | length 4.3
  Top w0.254: PC2.2 -26.035,-5.236 -25.899,-5.1 -25.146,-5.1 -23.495,-3.449 R14.1
N17346161: C24.1 R32.1 | length 1.8
  Top w0.4: R32.1 25.312,-5.08 C24.1
N17346163: C25.1 R33.1 | length 1.8
  Top w0.4: R33.1 25.458,-9.144 C25.1
N17346698: D1.1 J3.1 | length 3.5
  Bottom w0.8: J3.1 D1.1@5.09,-16.452
N17347463: Q1.1 R4.1 | length 1.3
  Bottom w0.254: Q1.1@9.779,-6.904 R4.1
N17347493: Q2.1 R3.1 | length 1.8
  Bottom w0.254: R3.1 Q2.1
N17349504: BC38.2 FB5.2 J6.4 | length 5.5
  Bottom w0.6: BC38.2@-2.25,1.742 FB5.2@-0.127,1.742 ; FB5.2@-0.128,1.743 J6.4
N17355278: BC2.2 FB6.2 FB7.2 J11.1 | length 9.4
  Bottom w0.254: BC2.2@7.785,3.459 J11.1@9.624,3.459 ; J11.1 J11.1@9.624,3.459 ; FB7.2 FB6.2 9.398,3.233 J11.1@9.624,3.459
N173250840: C31.1 U5.1 | length 3.3
  Bottom w0.254: U5.1 -2.76,-14.698 -2.355,-14.293 C31.1
N173253942: Q4.1 R15.2 | length 5.9
  Bottom w0.254: Q4.1 -26.118,10.987 -24.278,12.827 R15.2 ; Q4.1@-25.959,8.75 Q4.1@-25.959,9.155
POE_12: J12.1 R32.2 T1.15 | length 14.6
  Top w0.254: v1(20.353,-9.946) 23.899,-6.4 R32.2
  Top w0.4: R32.2 26.885,-6.4 J12.1
  Bottom w0.254: T1.15 16.12,-7.359 18.707,-9.946 v1(20.353,-9.946)
POE_36: J12.2 R33.2 T1.10 | length 14.6
  Top w0.254: v1(20.897,-10.599) 23.818,-7.678 R33.2
  Top w0.4: R33.2 26.868,-7.678 J12.2
  Bottom w0.254: T1.10 17.787,-13.709 v1(20.897,-10.599)
RTS_485: J2.9 U3.2 U3.3 | length 48.8
  Top w0.254: J2.9 -20.914,11.25 -24.003,8.161 -24.003,4.898 -23.206,4.101 -23.206,0.293 -20.481,-2.432 -12.769,-2.432 -12.233,-1.895 -7.349,-1.895 -2.342,3.111 v1(0.974,3.111)
  Bottom w0.254: v1(0.974,3.111) 2.07,3.111 3.649,1.532 U3.2 U3.3
SD0_CLK: J2.14 J6.5 RP6.1 | length 23.1
  Top w0.254: J2.14 -13.569,10.25 -10.284,6.965 -10.284,6.192 -8.314,4.222 -7.868,4.222 -4.905,7.185 -2.226,7.185 v1(-1.264,6.223) -0.461,6.223 0.139,6.823 0.144,6.823 0.423,7.102 0.423,7.107 0.487,7.171 RP6.1
  Bottom w0.254: v1@-1.264,6.25 v1(-1.264,6.223) -1.264,5.112 J6.5
SD0_CMD: J2.13 J6.3 RP7.5 | length 45.3
  Top w0.254: J2.13 -20.63,10.25 -22.752,8.128 -22.752,0.481 -20.315,-1.956 -12.935,-1.956 -12.421,-1.441 -7.537,-1.441 -2.486,3.61 0.581,3.61 v1(0.974,4.003) ; v1(0.974,6.196) 2.036,7.258 RP7.5
  Bottom w0.254: v1(0.974,4.003) J6.3 v1(0.974,6.196)
SD0_DATA0: J2.17 J6.7 RP6.3 | length 40.1
  Top w0.254: J2.17 -20.346,9.25 -21.844,7.752 -21.844,0.857 -19.939,-1.048 -13.311,-1.048 -12.797,-0.533 -7.965,-0.533 v1(-3.429,4.003) ; v1(-0.054,7.3) RP6.3@-0.054,8.453
  Bottom w0.254: v1(-3.429,4.003) -3.429,6.702 -2.831,7.3 v1(-0.054,7.3)
SD0_DATA1: J2.18 J6.8 RP6.5 | length 21.1
  Top w0.254: J2.18 -13.853,9.25 -11.192,6.589 -11.192,5.816 -8.689,3.313 -7.46,3.313 v1(-4.55,6.223) ; v1(-0.563,7.795) RP6.5
  Bottom w0.254: J6.8@-4.55,5.1 v1(-4.55,6.223) -2.978,7.795 v1(-0.563,7.795)
SD0_DATA2: J2.16 J6.1 RP7.7 | length 26.1
  Top w0.254: J2.16 -13.711,9.75 -10.738,6.777 -10.738,6.004 -8.501,3.767 -7.681,3.767 -4.717,6.731 -2.447,6.731 -1.462,5.746 -0.296,5.746 0.327,6.369 0.332,6.369 0.877,6.914 0.877,6.919 v1(1.486,7.528) RP7.7
  Bottom w0.254: v1(1.486,7.528) 2.016,7.528 3.175,6.369 J6.1@3.175,5.334
SD0_DATA3: J2.15 J6.2 RP7.3 | length 44.4
  Top w0.254: J2.15 -20.488,9.75 -22.298,7.94 -22.298,0.669 -20.127,-1.502 -13.123,-1.502 -12.609,-0.987 -7.725,-0.987 -2.674,4.064 0.36,4.064 0.776,4.48 1.574,4.48 v1(2.051,4.003) ; v1(2.032,6.223) 2.032,6.612 2.536,7.116 RP7.3 ; v1@2.036,6.257 v1@2.051,6.242
  Bottom w0.254: v1(2.032,6.223) 2.032,5.626 J6.2@2.07,5.588 ; v1(2.051,4.003) 2.051,5.061 J6.2
SD0_INS: J1.35 J6.CD RP6.7 | length 28.7
  Top w0.254: v1(-1.604,8.462) RP6.7 ; v1(6.477,11.25) 9.498,11.25 11.303,9.445 11.303,6.96 12.913,5.35 J1.35
  Bottom w0.254: J6.CD -5.626,6.058 -3.222,8.462 v1(-1.604,8.462) -1.604,9.15 0.496,11.25 v1(6.477,11.25)
TDN_OUT1: J2.3 J4.27 | length 23.8
  Top w0.254: J2.3 -17.177,12.75 v1(-16.646,13.28) ; v1(0.633,22.06) 0.75,21.942 J4.27
  Bottom w0.254: v1(-16.646,13.28) -15.467,13.28 -7.666,21.082 -0.345,21.082 v1(0.633,22.06)
TDN_OUT2: J2.6 J4.28 | length 25
  Top w0.254: v1(-16.646,12.25) J2.6 ; v1(1.25,22.372) J4.28
  Bottom w0.254: v1(-16.646,12.25) -15.855,12.25 -7.477,20.628 0.026,20.628 1.25,21.852 v1(1.25,22.372)
TPRX+: J1.48 T1.1 | length 12.4
  Top w0.254: J1.48 v1(19.177,2.35)
  Bottom w0.254: v1(19.177,2.35) 19.177,0.601 20.045,-0.267 20.045,-4.043 22.001,-5.999 23.643,-5.999 T1.1
TPRX-: J1.50 T1.3 | length 13.6
  Top w0.254: J1.50 18.288,1.825 v1(18.288,1.397)
  Bottom w0.254: v1(18.288,1.397) 18.723,0.962 18.723,0.413 19.591,-0.455 19.591,-4.351 22.405,-7.165 22.405,-8.419 22.63,-8.643 T1.3
TPRXN_CON: J3.4 T1.14 | length 14.3
  Bottom w0.3: J3.4 8.9,-18.024 12.446,-14.478 12.446,-10.167 13.984,-8.629 T1.14
TPRXP_CON: J3.3 T1.16 | length 17.3
  Bottom w0.3: J3.3 7.63,-18.332 11.811,-14.151 11.811,-9.874 13.36,-8.325 13.36,-6.706 13.977,-6.089 T1.16
TPTX+: J1.49 T1.6 | length 19
  Top w0.254: J1.49 v1(16.191,1.825)
  Bottom w0.254: v1(16.191,1.825) 17.669,0.347 17.669,-0.024 18.537,-0.891 18.537,-4.821 21.351,-7.635 21.351,-9.113 22.386,-10.149 22.386,-11.993 22.846,-12.453 T1.6
TPTX-: J1.47 T1.8 | length 24
  Top w0.254: J1.47 14.249,2.35 13.999,2.1 13.999,1.495 14.351,1.143 v1(15.494,1.143)
  Bottom w0.254: v1(15.494,1.143) 16.129,1.143 17.215,0.057 17.215,-0.212 18.083,-1.079 18.083,-5.009 20.897,-7.823 20.897,-9.301 21.932,-10.337 21.932,-14.241 22.684,-14.993 T1.8
TPTXN_CON: J3.6 T1.9 | length 6.9
  Bottom w0.3: J3.6 11.42,-17.536 13.977,-14.979 T1.9
TPTXP_CON: J3.5 T1.11 | length 10.1
  Bottom w0.3: J3.5 10.15,-17.718 13.081,-14.787 13.081,-13.081 13.723,-12.439 T1.11
TRX_N: J7.1 R23.2 R26.2 | length 6.6
  Top w0.254: v1(3.683,-8.001) R23.2
  Bottom w0.254: J7.1 3.683,-9.616 v1(3.683,-8.001) 3.868,-7.816 R26.2
TRX_P: J7.2 R26.1 R29.2 | length 6.6
  Top w0.254: v1(4.953,-8.001) R29.2
  Bottom w0.254: R26.1 4.768,-7.816 v1(4.953,-8.001) 4.943,-8.011 J7.2
UART0_RXD: J1.34 J8.2 | length 33
  Top w0.254: v1(12.436,21.822) 12.436,21.523 v1(16.233,17.726) ; v1(16.637,5.842) 18.067,5.842 J1.34
  Bottom w0.254: J8.2 v1(12.436,21.822) ; v1(16.233,17.726) 18.084,15.875 18.332,15.875 19.169,15.038 20.79,15.038 24.904,10.925 24.904,6.914 23.536,5.546 21.726,5.546 21.43,5.842 v1(16.637,5.842)
UART0_TXD: J1.36 J8.3 | length 34.6
  Top w0.254: v1(11.186,21.822) 11.462,21.822 16.945,16.34 v1(18.552,16.34) ; v1(17.033,5.35) J1.36
  Bottom w0.254: J8.3 v1(11.186,21.822) ; v1(17.033,5.35) 21.28,5.35 21.538,5.092 23.724,5.092 25.358,6.726 25.358,11.113 20.978,15.492 19.4,15.492 v1(18.552,16.34)
UART1_RXD: J1.4 R31.1 | length 12.3
  Top w0.254: v1(17.033,13.35) J1.4
  Bottom w0.254: v1(8.255,9.525) 8.255,10.743 10.58,13.068 10.975,13.068 10.998,13.045 15.42,13.045 15.884,13.509 16.874,13.509 v1(17.033,13.35)
UART1_TXD: J1.12 R25.1 U3.4 | length 20.4
  Top w0.254: v1(7.747,1.27) 7.747,7.092 v1(9.642,8.987) ; v1(17.033,11.35) J1.12
  Bottom w0.254: 6.545,0.704 R25.1 v1(7.747,1.27) ; v1(9.642,8.987) 9.642,9.902 11.265,11.525 15.685,11.525 15.86,11.35 v1(17.033,11.35)
USB_DN: J1.15 J11.2 | length 10.2
  Top w0.254: J1.15 v1(16.191,10.35)
  Bottom w0.254: J11.2 11.948,4.709 15.642,8.403 15.642,9.801 v1(16.191,10.35)
USB_DP: J1.14 J11.3 | length 10.7
  Top w0.254: v1(16.637,10.85) J1.14
  Bottom w0.254: J11.3 12.556,5.959 15.188,8.591 15.188,10.031 16.007,10.85 v1(16.637,10.85)
USB_VBUS: J1.16 R7.1 R8.1 | length 16.2
  Top w0.254: v1(11.186,-0.254) 11.186,-0.576 R8.1 R7.1 ; v1(16.764,9.921) 17.193,10.35 J1.16
  Bottom w0.254: v1(11.186,-0.254) 11.186,1.905 11.67,2.389 12.212,2.389 14.193,4.37 14.193,5.176 16.096,7.079 16.096,9.253 v1(16.764,9.921)
USB_VBUS_EN: J1.3 R16.1 | length 5.7
  Top w0.254: R16.1 11.938,16.288 13.588,14.638 13.588,13.608 13.846,13.35 J1.3
USB_VBUS_OCN: J1.42 R17.1 | length 2
  Top w0.254: v1(17.073,3.85) J1.42
  Bottom w0.254: v1(17.073,3.85) R17.1
VD_CS: J1.11 J4.37 | length 15.5
  Top w0.254: v1(5.75,19.466) J4.37 ; v1(12.155,14.79) 12.193,14.828 12.193,12.93 13.774,11.35 J1.11
  Bottom w0.254: v1(5.75,19.466) 5.75,19.165 5.896,19.019 5.9,19.019 6.179,18.74 6.179,18.736 7.824,17.091 9.855,17.091 v1(12.155,14.79)
VD_D0: J2.35 J4.11 | length 21.6
  Top w0.254: J2.35@-17.981,4.75 v1(-16.764,4.75) ; v1(-9.398,11.697) -9.398,17.318 -7.25,19.466 J4.11
  Bottom w0.254: v1(-16.764,4.75) -16.345,4.75 v1(-9.398,11.697)
VD_D1: J2.33 J4.12 | length 22.9
  Top w0.254: v1(-8.89,12.98) -8.89,17.184 -6.75,19.324 J4.12
  Bottom w0.254: v1(-17.152,5.25) -16.821,5.581 -16.288,5.581 v1(-8.89,12.98)
VD_D2: J2.40 J4.13 | length 22.4
  Top w0.254: J2.40 v1(-13.716,3.75) ; v1(-8.382,7.793) -8.382,17.05 -6.25,19.182 J4.13
  Bottom w0.254: v1(-13.716,3.75) -12.425,3.75 v1(-8.382,7.793)
VD_D3: J2.36 J4.14 | length 24
  Top w0.254: J2.36 v1(-12.845,4.75) ; v1(-7.874,9.713) -7.874,16.916 -5.75,19.04 J4.14
  Bottom w0.254: v1@-12.837,4.75 v1(-7.874,9.713)
VD_D4: J2.38 J4.16 | length 25
  Top w0.254: J2.38 v1(-13.327,4.25) ; v1(-7.366,10.16) -7.366,16.782 -4.75,19.398 J4.16
  Bottom w0.254: v1(-13.327,4.25) -12.598,4.25 -8.859,7.989 ; -8.859,7.991 -7.366,9.484 v1(-7.366,10.16)
VD_D5: J2.37 J4.17 | length 23.5
  Top w0.254: J2.37 v1(-17.152,4.25) ; v1(-6.858,13.509) -6.858,16.648 -4.25,19.256 J4.17
  Bottom w0.254: v1(-17.152,4.25) -16.117,4.25 v1(-6.858,13.509)
VD_D6: J2.41 J4.18 | length 27.6
  Top w0.254: J2.41 v1(-17.152,3.25) ; v1(-6.827,12.164) -6.35,12.641 -6.35,16.514 -3.75,19.114 J4.18
  Bottom w0.254: v1(-17.152,3.25) -15.741,3.25 v1(-6.827,12.164)
VD_D7: J2.39 J4.19 | length 24.5
  Top w0.254: J2.39 v1(-16.764,3.75) ; v1(-5.231,16.867) -3.25,18.848 J4.19
  Bottom w0.254: v1(-16.764,3.75) -15.942,3.75 -5.715,13.977 -5.715,16.383 v1(-5.231,16.867)
VD_D8: J2.44 J4.21 | length 25.3
  Top w0.254: J2.44 v1(-13.716,2.75) ; v1(-4.953,9.845) -2.25,12.548 J4.21
  Bottom w0.254: v1(-13.716,2.75) -12.048,2.75 v1(-4.953,9.845)
VD_D9: J2.46 J4.22 | length 28.7
  Top w0.254: J2.46 v1(-14.097,2.25) ; v1@-1.75,12.378 J4.22
  Bottom w0.254: v1(-14.097,2.25) -11.873,2.25 v1(-1.764,12.359)
VD_D10: J2.42 J4.23 | length 25.1
  Top w0.254: J2.42 v1(-14.097,3.25) ; v1(-1.25,14.25) J4.23
  Bottom w0.254: v1(-14.097,3.25) -12.25,3.25 v1(-1.25,14.25)
VD_D11: J2.43 J4.24 | length 29.4
  Top w0.254: J2.43 v1(-16.764,2.75) ; v1(-0.75,17.526) J4.24
  Bottom w0.254: v1(-16.764,2.75) -15.526,2.75 v1(-0.75,17.526)
VD_HS: J2.45 J4.6 | length 26.7
  Top w0.254: v1(-19.431,2.25) J2.45 J2.45@-17.953,2.25 ; v1(-11.83,13.659) -10.877,14.612 -10.877,17.766 -9.75,18.893 J4.6
  Bottom w0.254: v1(-19.431,2.25) -19.015,2.666 -19.015,6.474 v1(-11.83,13.659)
VD_PCLK: J2.50 J4.9 | length 25.2
  Top w0.254: v1(-16.129,1.225) J2.50 ; v1(-9.906,13.441) -9.906,17.452 -8.25,19.108 J4.9
  Bottom w0.254: v1(-16.129,1.225) -17.653,2.749 -17.653,5.694 v1(-9.906,13.441)
VD_RSTN: J1.1 J4.36 | length 16.5
  Top w0.254: J4.36 5.25,18.994 v1(5.702,18.542) ; v1(14.065,13.875) J1.1
  Bottom w0.254: v1(5.702,18.542) 7.607,16.637 9.634,16.637 12.396,13.875 v1(14.065,13.875)
VD_SCK: J1.8 J4.35 | length 18.5
  Top w0.254: J4.35 4.75,18.618 v1(10.777,12.591) ; v1(16.637,12.889) 17.176,12.35 J1.8
  Bottom w0.254: v1(10.777,12.591) 15.608,12.591 15.906,12.889 v1(16.637,12.889)
VD_SIMO: J1.10 J4.34 | length 21.6
  Top w0.254: J4.34 4.25,18.443 10.628,12.065 v1(11.303,12.065) ; v1(16.637,11.85) J1.10
  Bottom w0.254: v1(11.303,12.065) 15.787,12.065 16.002,11.85 v1(16.637,11.85)
VD_SOMI: J1.13 J4.38 | length 17.5
  Top w0.254: J4.38 6.25,17.793 13.193,10.85 J1.13
VD_VS: J2.47 J4.7 | length 24.2
  Top w0.254: v1(-19.05,1.75) J2.47 ; v1(-10.844,13.97) -10.414,14.4 -10.414,17.586 -9.25,18.75 J4.7
  Bottom w0.254: v1(-19.05,1.75) -18.561,2.239 -18.561,6.253 v1(-10.844,13.97)
ZOOM_CTRL_CLK: J2.28
ZOOM_CTRL_DIR: J2.32
ZOOM_CTRL_EN: J2.25
ZOOM_CTRL_NFAULT: J2.19
ZOOM_CTRL_NSLEEP: J2.22
pads on no net: J1.6 J1.18 J1.19 J1.20 J1.21 J1.23 J1.25 J1.38 J1.40 J2.5 J2.7 J2.20 J4.4 J4.29 J4.32 J4.M3 J4.M4 J6.13 J6.14 RP7.1
copper on no net:
  other v1: 17.787,-11.176

## Polygon pours and split planes (outlines as drawn)
GND on Bottom "Bottom-No Net" (solid, remove dead copper, pour order 2): -35.433,44.704 -36.703,43.434 -36.703,28.956 -36.703,-41.021 -33.528,-44.196 -31.623,-46.101 28.194,-46.101 29.972,-46.101 33.147,-42.926 32.131,-41.91 32.131,41.783 32.131,43.307 32.004,43.434
GND on Top "Top_GND" (solid, remove dead copper, pour order 4): -33.655,42.418 -34.544,41.529 -34.544,-40.894 -34.544,-42.545 -31.623,-45.466 -30.988,-44.831 28.194,-44.831 28.194,-43.434 31.242,-40.386 33.147,-38.481 33.147,40.767 33.147,42.164 30.734,44.577

## Keep-outs
Keep-Out Layer:
  lines w0.127: -30.234,-4.022 ccw(c0,0) -6.011,-29.902 ; -30.234,-4 -25,-4 -25,4 -30.234,4 ; -30.234,4.022 cw(c0,0) -6.018,29.9 ; -6,-29.9 -6,-25 6,-25 6,-29.9 ; -6,29.9 -6,25 6,25 6,29.9 ; 6.008,-29.902 ccw(c0,0) 30.236,-4.001 ; 6.011,29.902 cw(c0,0) 30.234,4.018 ; 30.228,-4 25,-4 25,4 30.234,4

## Other copper
Top:
  pour cut-out: 24.888,-4 24.384,-4.504 24.384,-9.056 25.18,-9.852 27.252,-9.852 27.252,-4
  pour cut-out: 25.781,-8.237 28.321,-8.237 28.321,-5.842 25.781,-5.842
Bottom:
  pour cut-out: -4.572,-17.716 -11.557,-17.716 -11.557,-24.701 -4.572,-24.701
  pour cut-out: -0.579,-15.11 -0.576,-15.113 6.221,-15.113 6.221,-17.907 -0.579,-17.907

## Silkscreen, mask and mechanical layers (free items; w line width, h text height)
Solder Mask Top:
  lines w1: -29.738,-3.956 ccw(c0,0) -5.913,-29.412 ; -29.738,3.956 cw(c0,0) -5.919,29.41 ; 5.91,-29.412 ccw(c0,0) 29.741,-3.936 ; 5.913,29.412 cw(c0,0) 29.739,3.952
Solder Mask Bottom:
  lines w1: -29.738,-3.956 ccw(c0,0) -5.913,-29.412 ; -29.738,3.956 cw(c0,0) -5.919,29.41 ; 5.91,-29.412 ccw(c0,0) 29.741,-3.936 ; 5.913,29.412 cw(c0,0) 29.739,3.952